# Altium PCB ES_PCB_6C_2L_2023.PcbDoc
Units mm, origin at the board's own origin, x right, y up, seen from the top; angles counter-clockwise.
Board outline 60 x 60 mm, 2 copper layers (Top Layer, Bottom Layer), stack 1.586 mm thick; 88 components, 85 nets, 290 pads, 95 vias.
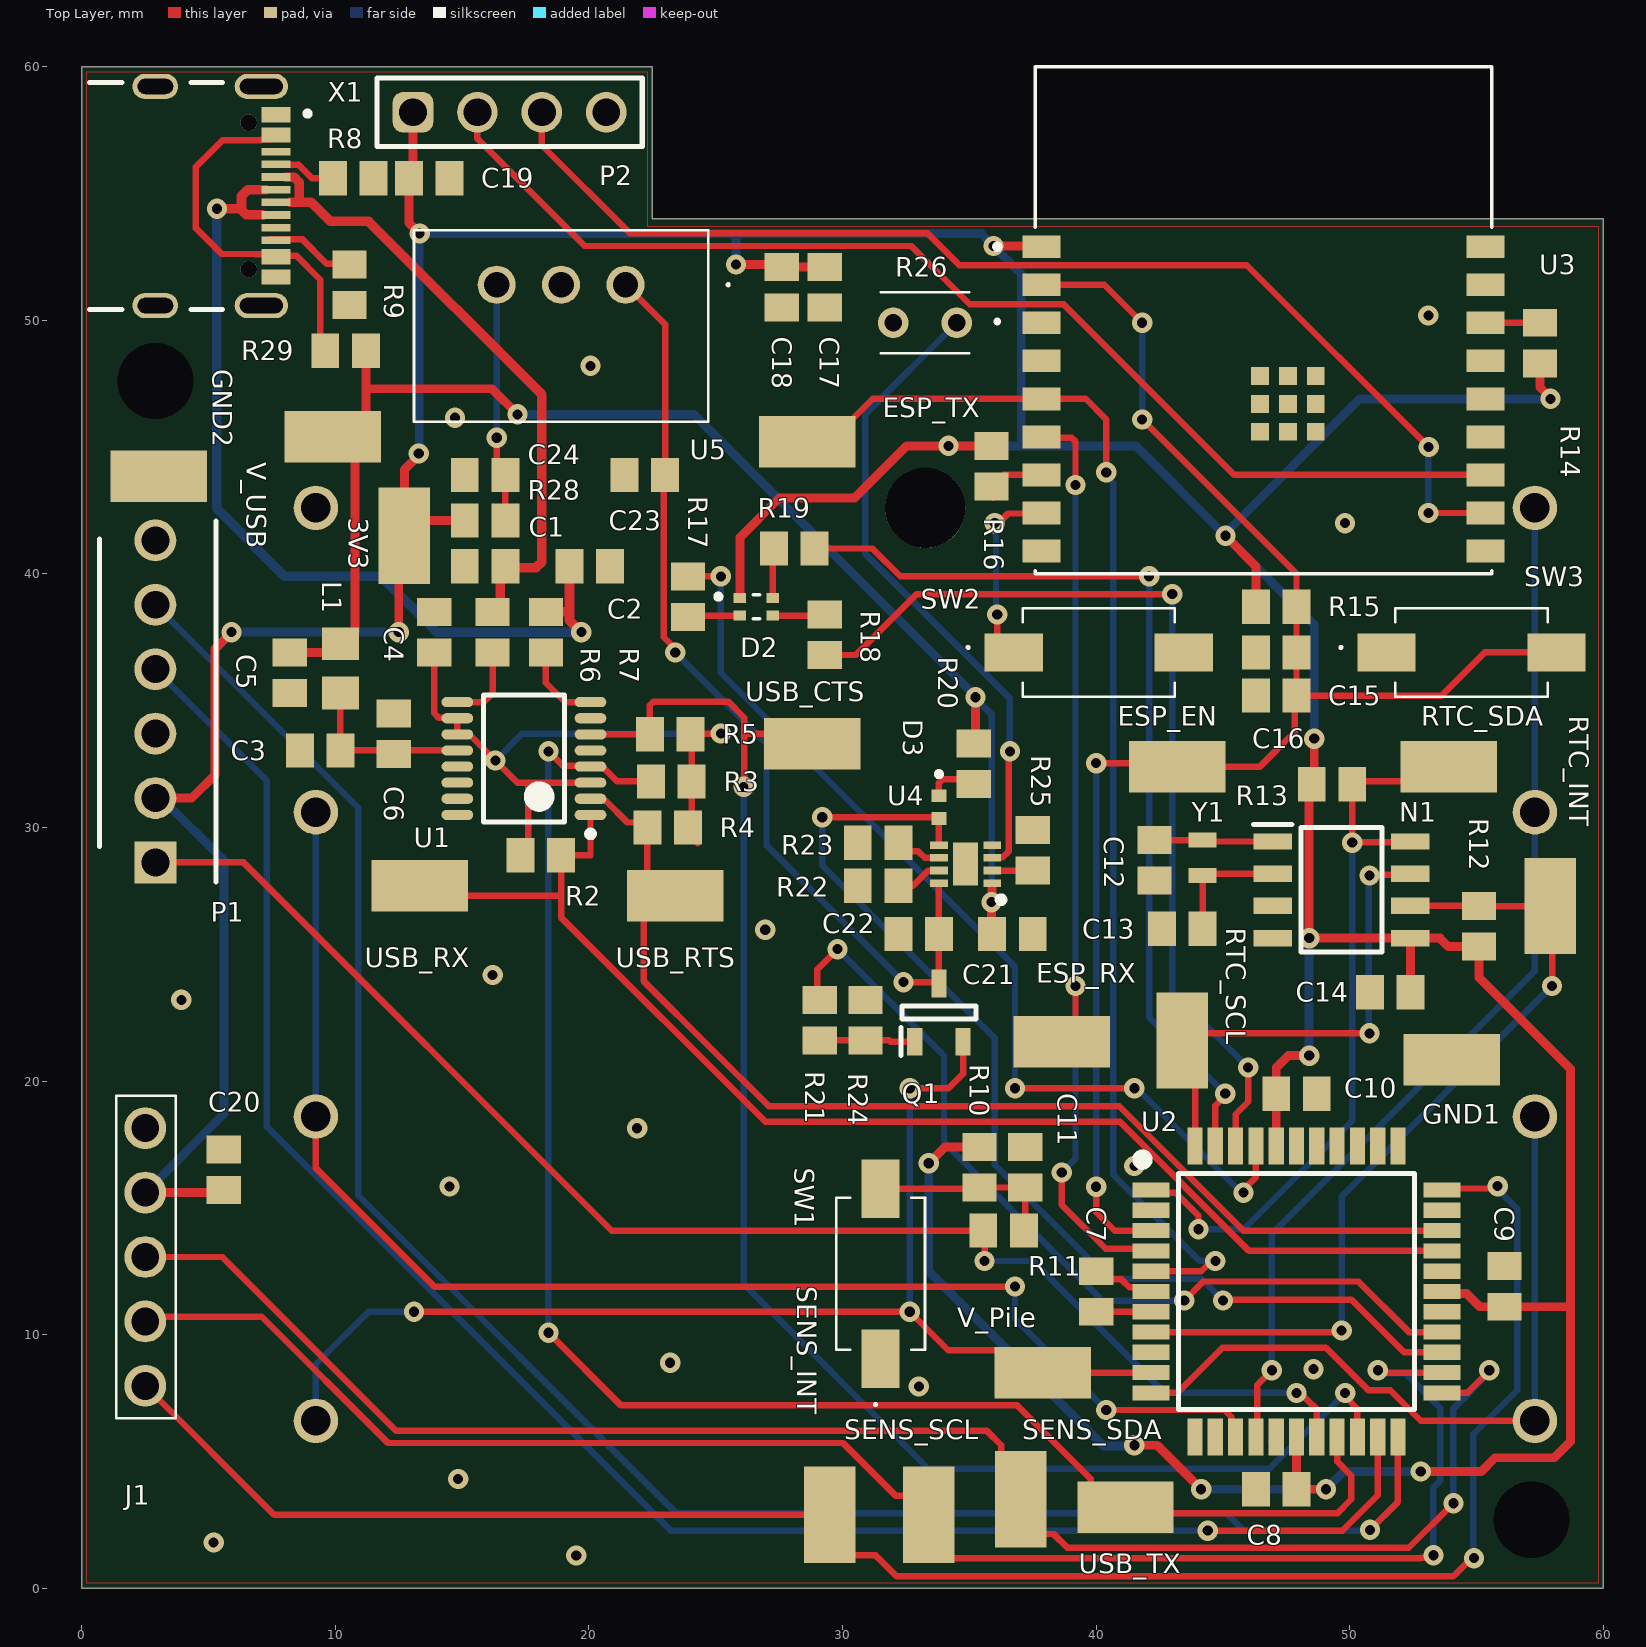
[diagram p0: Top Layer view]
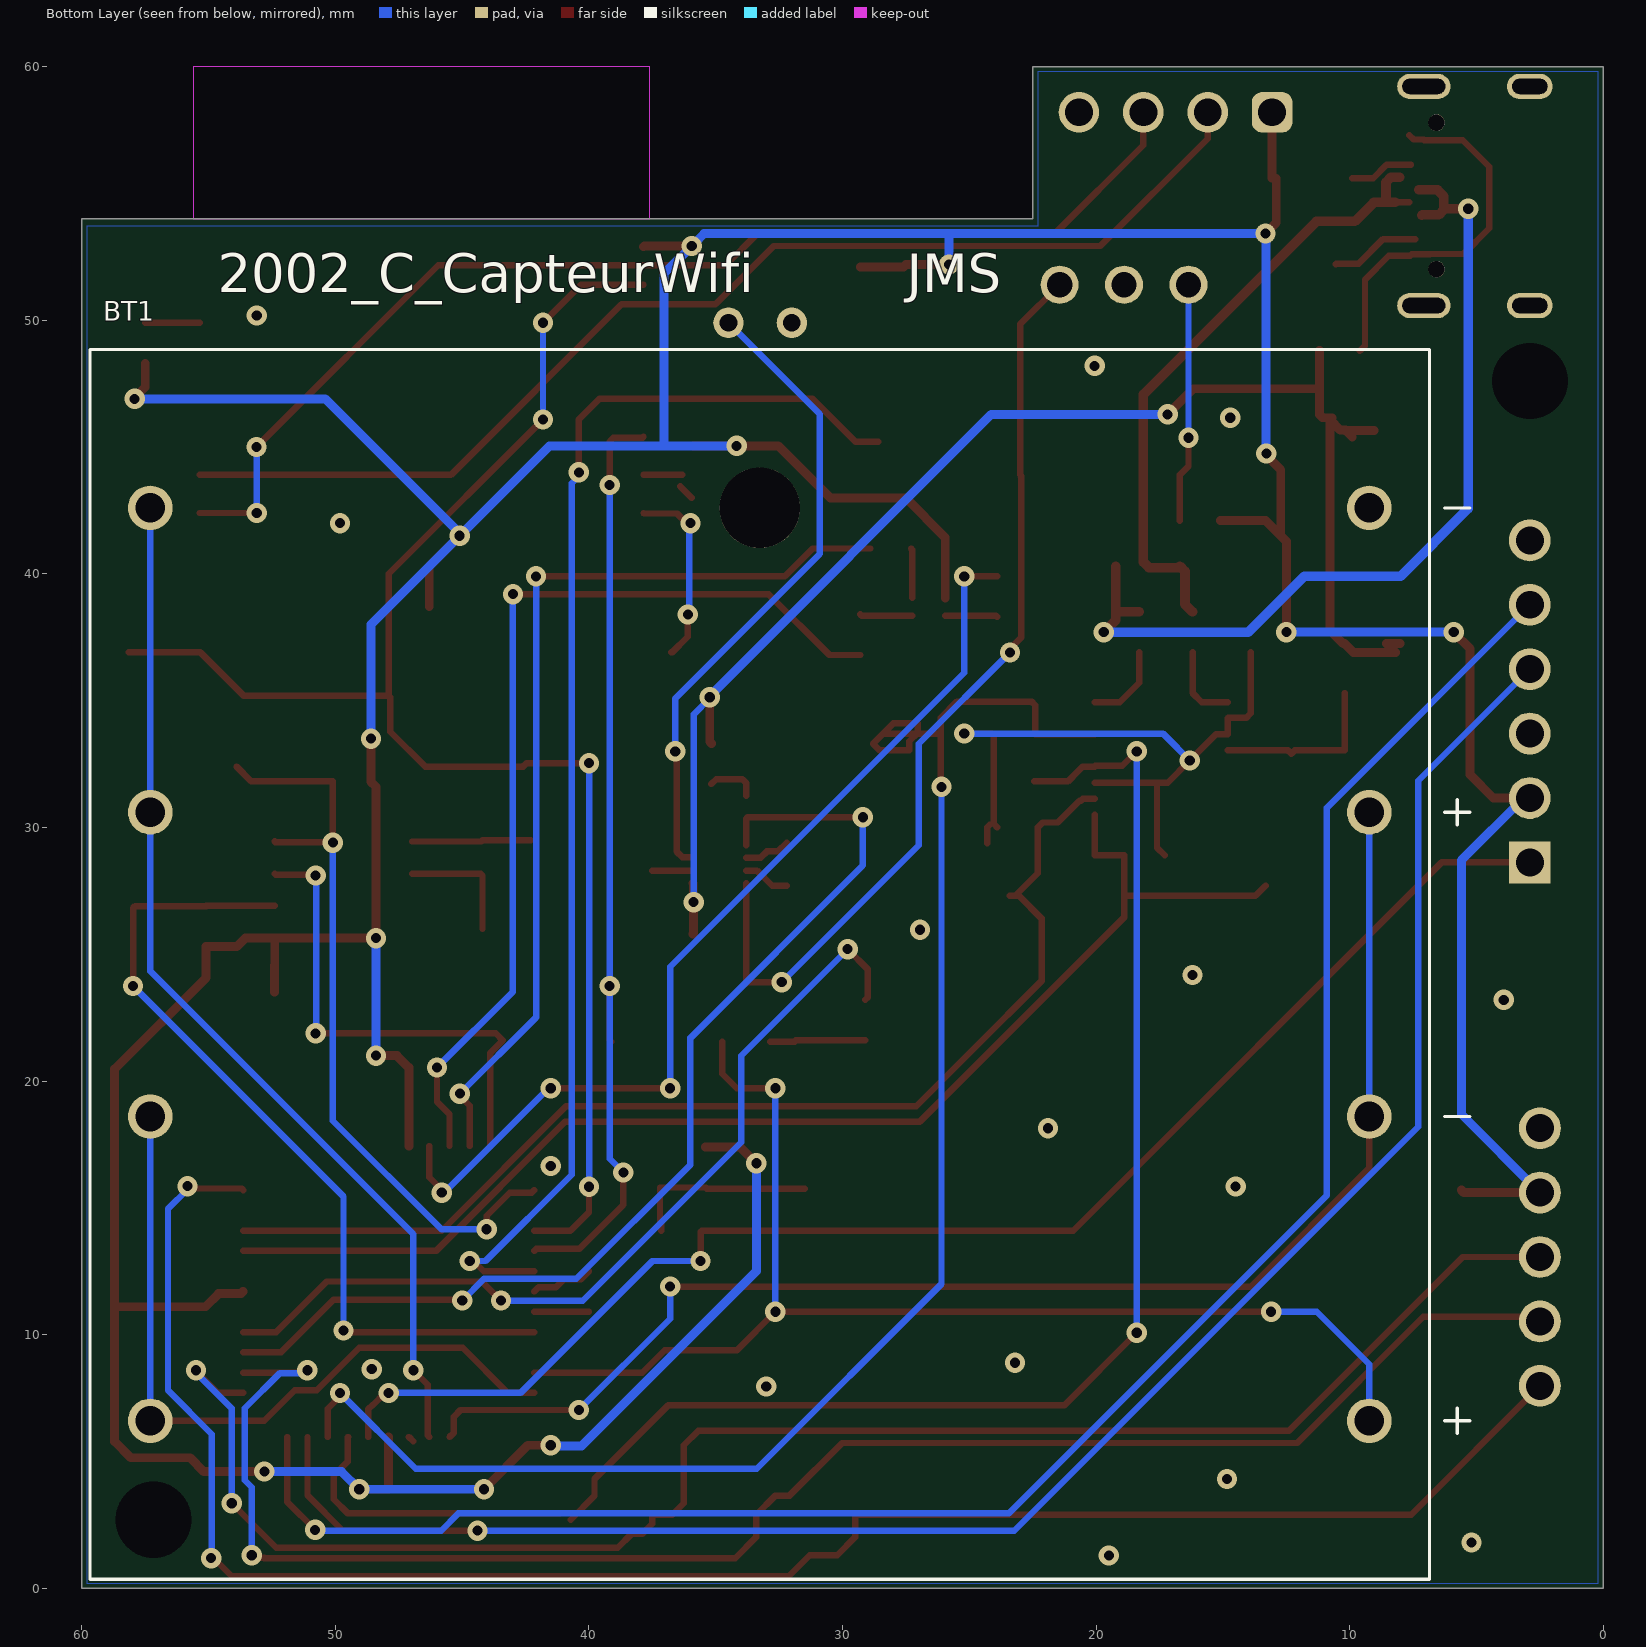
[diagram p1: Bottom Layer view, seen from below]

## Layer stack, top to bottom
Top Solder: solder mask 0.0102, Solder Resist, Dk 3.5
Top Layer: signal copper 0.018
Dielectric1: core 1.55, FR-4, Dk 4.8
Bottom Layer: signal copper 0.018
Bottom Solder: solder mask 0.0102, Solder Resist, Dk 3.5

## Board outline
0,60 22.5,60 22.5,54 60,54 60,0 0,0

## Design rules (kind name [scope] priority, off if disabled: settings)
BoardOutlineClearance [All] p1: gap=0.25 ignorepadtopadclearanceinfootprint=FALSE except(0: Arc-SplitContinuation Track-SplitContinuation SMDPad-SplitContinuation THPad-SplitContinuation Via-SplitContinuation Fill-SplitContinuation Poly-SplitContinuation Region-SplitContinuation Text-SplitContinuation)
Clearance Clearance-xPP-xTP-xTT [All] p1: gap=0.151 ignorepadtopadclearanceinfootprint=FALSE
ComponentClearance [All] p1: gap=0.25 collisioncheckmode=3 verticalgap=0.25 showdistances=FALSE
DiffPairsRouting [All] p1: maxlimit=0.25 minlimit=0.25 mostfreqgap=0.25 toplayer_minwidth=0.381 toplayer_maxwidth=0.381 toplayer_prefwidth=0.381 bottomlayer_minwidth=0.381 bottomlayer_maxwidth=0.381 bottomlayer_prefwidth=0.381 maxuncoupledlength=12.5
Height [All] p1: minheight=0 maxheight=25 prefheight=12.5
HoleSize HoleSize-PTH [All] p1: absolutevalues=TRUE maxlimit=10 minlimit=0.25 maxpercent=80.000 minpercent=20.000
HoleToHoleClearance [All] p1: gap=0.35 allowstackedmicrovias=TRUE
MinimumAnnularRing "Minimum IAR  >0.45mm" [((ObjectKind = 'Pad') OR (ObjectKind = 'Via')) And (Layer = 'MultiLayer') And (HoleDiameter > AsMM(0.45))] p1: minimumring=0.175 // minimum inner annular ring for pads > 0.45mm finished hole size
MinimumAnnularRing "Minimum IAR <=0.45mm" [((ObjectKind = 'Pad') OR (ObjectKind = 'Via')) And (Layer = 'MultiLayer') And (HoleDiameter <= AsMM(0.45))] p2: minimumring=0.175 // minimum inner annular ring for pads <= 0.45mm finished hole size
MinimumSolderMaskSliver [All] p1: minsoldermaskwidth=0.08
PasteMaskExpansion [All] p1: expansion=-0.025
PlaneClearance PlaneClearance-IPI [All] p1: clearance=0.25
PlaneConnect [All] p1: planeconnectstyle=Relief reliefexpansion=0.175 reliefentries=4 reliefconductorwidth=0.2 reliefairgap=0.2
PolygonConnect PolygonConnect-xTW [All] p1: connectstyle=Relief reliefconductorwidth=0.2 reliefentries=4 polygonreliefangle="90 Angle" airgapwidth=0.2
RoutingCorners [All] p1: cornerstyle=45-Degree minsetback=2.5 maxsetback=2.5
RoutingVias RoutingViasES [All] p1: holewidth=0.4 width=0.8 viastyle="Through Hole" minholewidth=0.25 minwidth=0.61 maxholewidth=0.5 maxwidth=1 // finishet hole size <= 0.45mm
SilkToSilkClearance [All] p1: silktosilkclearance=0.2
SilkToSolderMaskClearance SilkscreenOverComponentPads [IsPad] p1: minsilkscreentomaskgap=0.2 clearancetoexposedcopper=TRUE
SolderMaskExpansion [All] p1: expansion=0 istentingtop=FALSE
UnRoutedNet [All] p1: checkbadconnections=TRUE
Width Width-xTW [All] p1: maxlimit=1.5 minlimit=0.254 preferedwidth=0.254 minimp=50.000000 maximp=50.000000 favimp=50.000000
17 further rules are at their usual default settings.

## Classes and differential pairs
component class Puissance: C1 C2 C3 C4 C5 C6 L1 R2 R3 R4 R5 R6 R7 R8 R9 R29 U1 V_USB
component class Microcontrôleur: C7 C8 C9 C10 C11 P1 R10 R11 SW1 U2
component class Ethernet: C12 C13 C14 N1 R12 R13 Y1
component class ESP32: C15 C16 C17 C18 C19 P2 R14 R15 R16 SW2 SW3
component class Communication: C20 D2 J1 R17 R18 R19
component class 2002_SchemaBloc: ESP_EN ESP_RX ESP_TX RTC_INT RTC_SCL RTC_SDA SENS_INT SENS_SCL SENS_SDA USB_CTS USB_RTS USB_RX USB_TX V_Pile
differential pair DATA: +DATA_P -DATA_N

## Components (designator, comment, footprint, x,y, rotation, side; value= is the part's Value field where it differs from the comment)
3V3 "5019" TESTPOINT_SMD 12.72,41.5 r90 top
BT1 "BK-1264-PC8" BAT_BK-1264-PC8 33.265,24.6 r0 bottom
C1 "47pF" 0805 15.9,40.3 r180 top
C2 "47pF" 0805 20.032,40.3 r0 top
C3 "100nF" 0805 9.4,33.035 r180 top
C4 "100nF" 0805 13.9,37.7 r90 top
C5 "10nF" 0805 8.2,36.1 r270 top
C6 "4u7F" 0805 12.3,33.7 r90 top
C7 "10uF" 0805 40,11.7 r90 top
C8 "100nF" 0805 47.1,3.9 r0 top
C9 "100nF" 0805 56.1,11.9 r270 top
C10 "100nF" 0805 47.9,19.5 r180 top
C11 "100nF" 0805 37.2,16.6 r90 top
C12 "10pF" 0805 42.3,28.7 r90 top
C13 "10pF" 0805 43.4,26 r0 top
C14 "100nF" 0805 51.6,23.5 r180 top
C15 "1uF" 0805 47.1,36.9 r0 top
C16 "100nF" 0805 47.1,35.2 r180 top
C17 "10uF" 0805 29.3,51.3 r90 top
C18 "100nF16" 0805 27.6,51.3 r90 top
C19 "100nF" 0805 13.7,55.6 r180 top
C20 "100nF" 0805 5.6,16.5 r90 top
C21 "1uF" 0805 36.7,25.8 r0 top
C22 "1uF" 0805 33,25.8 r180 top
C23 "10uF" 0805 22.2,43.9 r180 top
C24 "22uF" 0805 15.9,43.9 r180 top
D2 "Red & Green & Blue,120°" LED_APHF1608LSEEQBDZGKC 26.6,38.7 r0 top
D3 "SML-P11VTT86R" LED_SML-P11VTT86R 33.8,30.8 r270 top
ESP_EN "5019" TESTPOINT_SMD 43.2,32.4 r180 top
ESP_RX "5019" TESTPOINT_SMD 38.646,21.55 r0 top
ESP_TX "5019" TESTPOINT_SMD 28.6,45.2 r180 top
GND1 "5019" TESTPOINT_SMD 54.028,20.842 r180 top
GND2 "5019" TESTPOINT_SMD 3.028,43.847 r180 top
J1 "SEN-22858" SEN-22858 2.5,18.14 r270 top
L1 "Inductance" FB_MI0805K601R-10 10.2,36.273 r270 top
N1 "MCP79411" MCP79411 49.678,27.54 r0 top
P1 "6 Pin header" "conecteur 1x6" 2.9,28.62 r90 top
P2 "4 pin header" 1x4 16.87,58.2 r0 top
Q1 "MOS_P" SI5618-TP 33.8,22.7 r90 top
R2 "10k" 0805 18.1,28.9 r180 top
R3 "10k" 0805 23.244,31.813 r0 top
R4 "10k" 0805 23.1,30 r0 top
R5 "10k" 0805 23.2,33.675 r0 top
R6 "27R" 0805 16.2,37.7 r270 top
R7 "27R" 0805 18.3,37.7 r270 top
R8 "5k1" 0805 10.7,55.6 r180 top
R9 "5k1" 0805 10.56,51.4 r90 top
R10 "10k" 0805 35.4,16.6 r270 top
R11 "1k" 0805 36.348,14.1 r180 top
R12 "10k" 0805 55.1,26.1 r90 top
R13 "10k" 0805 49.3,31.7 r0 top
R14 "10k" 0805 57.5,49.1 r90 top
R15 "10k" 0805 47.1,38.7 r0 top
R16 "10k" 0805 35.875,44.246 r90 top
R17 "560R" 0805 23.9,39.1 r270 top
R18 "100R" 0805 29.3,37.6 r90 top
R19 "100R" 0805 28.1,41 r180 top
R20 "3k2" 0805 35.174,32.513 r270 top value=3k
R21 "1k" 0805 29.1,22.4 r90 top
R22 "15k" 0805 31.4,27.7 r0 top
R23 "8k2" 0805 31.4,29.4 r0 top
R24 "10k" 0805 30.9,22.4 r270 top
R25 "4k3" 0805 37.5,29.1 r270 top
R26 "103AT-2" 103AT51PFT 34.5,49.9 r180 top
R28 "0R" 0805 15.9,42.1 r0 top
R29 "0R" 0805 10.4,48.8 r0 top
RTC_INT "5019" TESTPOINT_SMD 57.9,26.9 r90 top
RTC_SCL "5019" TESTPOINT_SMD 43.4,21.6 r90 top
RTC_SDA "5019" TESTPOINT_SMD 53.9,32.4 r180 top
SENS_INT "5019" TESTPOINT_SMD 29.5,2.9 r270 top
SENS_SCL "5019" TESTPOINT_SMD 33.4,2.9 r270 top
SENS_SDA "5019" TESTPOINT_SMD 37.02,3.502 r270 top
SW1 "Bouton" Switch 31.5,12.4 r90 top
SW2 "Bouton" Switch 40.1,36.9 r0 top
SW3 "Bouton" Switch 54.8,36.9 r0 top
U1 "FT230XS" FTDI-SSOP-16_L 17.435,32.717 r180 top
U2 "PIC32MX130F256D" PIC32MX130F256D-I/PT 47.9,11.7 r0 top
U3 "ESP32-C3-WROOM-02-N4" ESP32-C3-WROOM-02-H4 46.6,50 r0 top
U4 "BQ25172" BQ25172DSGR 34.85,28.55 r180 top
U5 "173950336" 173950336 21.44,51.4 r180 top
USB_CTS "5019" TESTPOINT_SMD 28.8,33.3 r180 top
USB_RTS "5019" TESTPOINT_SMD 23.4,27.3 r0 top
USB_RX "5019" TESTPOINT_SMD 13.32,27.7 r180 top
USB_TX "5019" TESTPOINT_SMD 41.158,3.2 r180 top
V_Pile "5019" TESTPOINT_SMD 37.9,8.5 r0 top (schematic designator V_Pile_Accu)
V_USB "5019" TESTPOINT_SMD 9.9,45.4 r0 top
X1 "USB-C" GCT_USB4105-GF-A 2.9,54.9 r270 top
Y1 "830062558" WE-XTAL_IQXC-25 44.2,28.8 r90 top

## Footprints (in the part's own frame and the unit in brackets; to place one, negate y for a bottom-side part, rotate by r counter-clockwise, add the part's x,y. Pads: shape width x height; smd on the part's side, far side on the other; paste and mask are expansions set on the pad)
1x4 [mm] "Pin Header, pitch 2.54 mm, THT, Vertical, single row, 4p"
  rrect50% 1.6x1.6 hole 1.1: 1(-3.81,0)
  round 1.6 hole 1.1: 2(-1.27,0) 3(1.27,0) 4(3.81,0)
  silkscreen extent -5.23,-1.34 5.23,1.35, body extent -5.08,-1.27 5.08,1.27, height 8.57
103AT51PFT [mm]
  round 1.2 hole 0.7: 1(0,0) 2(2.5,0)
  silkscreen extent -1.65,-1.2 3,1.2
0805 [mm] "Chip Capacitor, 2-Leads, Body 2.00x1.25mm, IPC High Density"
  rect 1.1x1.35 smd: 1(-0.8,0) 2(0.8,0)
  body extent -1.1,-0.72 1.1,0.72, height 1.4
173950336 [mm]
  round 1.5 hole 1: 1(0,0) 2(2.54,0) 3(5.08,0)
  silkscreen extent -4.1,-2.15 8.34,5.4
BAT_BK-1264-PC8 [mm]
  round 1.755 hole 1.17: 1+(-24.035,18) 1-(24.035,18) 2+(24.035,6) 2-(-24.035,6) 3+(-24.035,-6) 3-(24.035,-6) 4+(24.035,-18) 4-(-24.035,-18)
  round 3.17 hole 3.17 unplated: ""(0,-18)
  silkscreen extent -28,-24.25 26.41,24.25
BQ25172DSGR [mm]
  rect 0.7x0.3 smd: 1(-1.05,0.75) 2(-1.05,0.25) 3(-1.05,-0.25) 4(-1.05,-0.75) 5(1.05,-0.75) 6(1.05,-0.25) 7(1.05,0.25) 8(1.05,0.75)
  rect 1x1.7 smd: 9(0,0)
  silkscreen extent -1.53,1.28 -1.28,1.52
"conecteur 1x6" [mm]
  rect 1.65x1.65 hole 1.1: 1(0,0)
  round 1.65 hole 1.1: 2(2.54,0) 3(5.08,0) 4(7.62,0) 5(10.16,0) 6(12.7,0)
  silkscreen extent -0.77,-2.4 13.47,2.2, body extent -0.77,-2.3 13.47,2.3, height 9.34
ESP32-C3-WROOM-02-H4 [mm]
  rect 1.5x0.9 smd: 1(-8.75,2.9) 2(-8.75,1.4) 3(-8.75,-0.1) 4(-8.75,-1.6) 5(-8.75,-3.1) 6(-8.75,-4.6) 7(-8.75,-6.1) 8(-8.75,-7.6) 9(-8.75,-9.1) 10(8.75,-9.1) 11(8.75,-7.6) 12(8.75,-6.1) 13(8.75,-4.6) 14(8.75,-3.1) 15(8.75,-1.6) 16(8.75,-0.1) 17(8.75,1.4) 18(8.75,2.9)
  rect 0.7x0.7 smd: 19(-0.14,-2.2) 20(0.96,-2.2) 21(2.06,-2.2) 22(-0.14,-3.3) 23(0.96,-3.3) 24(2.06,-3.3) 25(-0.14,-4.4) 26(0.96,-4.4) 27(2.06,-4.4)
  Keep-Out Layer region: 9,4 -9,4 -9,10 9,10
  Keep-Out Layer region: 9,4 -9,4 -9,10 9,10
  silkscreen extent -10.6,-10 9,10, body extent -9,-10 9,10, height 3.35
FB_MI0805K601R-10 [mm]
  rect 1.285x1.47 smd: 1(-0.973,0) 2(0.973,0)
FTDI-SSOP-16_L [mm] "SOP, 16-Leads, Body 5x4mm, Pitch 0.635mm, IPC High Density"
  oval 1.25x0.4 smd: 1(-2.625,2.222) 2(-2.625,1.587) 3(-2.625,0.952) 4(-2.625,0.317) 5(-2.625,-0.318) 6(-2.625,-0.953) 7(-2.625,-1.588) 8(-2.625,-2.223) 9(2.625,-2.223) 10(2.625,-1.588) 11(2.625,-0.953) 12(2.625,-0.318) 13(2.625,0.317) 14(2.625,0.952) 15(2.625,1.587) 16(2.625,2.222)
  silkscreen extent -2.75,-2.5 1.6,3.1, body extent -2,-2.5 2,2.5, height 1.76
GCT_USB4105-GF-A [mm]
  rect 0.6x1.15 smd mask+0.05: A1_B12(-3.2,4.755) A4_B9(-2.4,4.755) B1_A12(3.2,4.755) B4_A9(2.4,4.755)
  rect 0.3x1.15 smd mask+0.05: A5(-1.25,4.755) A6(-0.25,4.755) A7(0.25,4.755) A8(1.25,4.755) B5(1.75,4.755) B6(0.75,4.755) B7(-0.75,4.755) B8(-1.75,4.755)
  oval 1x2.1 hole 0.6 slot 1.7 at 90 deg: SH1(-4.32,4.18) SH2(4.32,4.18)
  oval 1x1.8 hole 0.6 slot 1.4 at 90 deg: SH3(-4.32,0) SH4(4.32,0)
  round 0.65 hole 0.65 unplated: ""(-2.89,3.68) ""(2.89,3.68)
  silkscreen extent -4.47,-2.6 4.47,6.1
LED_APHF1608LSEEQBDZGKC [mm] "RGB"
  rect 0.5x0.4 smd: 1(-0.65,0.35) 2(-0.65,-0.35) 3(0.65,-0.35) 4(0.65,0.35)
  silkscreen extent -1.6,-0.48 0.14,0.5
LED_SML-P11VTT86R [mm]
  rect 0.5x0.6 smd: 1(0.45,0) 2(-0.45,0)
  silkscreen extent -1.4,-0.1 -1.2,0.1, body extent -0.5,-0.3 0.5,0.3, height 0.21
MCP79411 [mm]
  rect 1.525x0.65 smd: 1(-2.712,1.905) 2(-2.712,0.635) 3(-2.712,-0.635) 4(-2.712,-1.905) 5(2.712,-1.905) 6(2.712,-0.635) 7(2.712,0.635) 8(2.712,1.905)
  silkscreen extent -3.47,-2.45 1.6,2.58
PIC32MX130F256D-I/PT [mm]
  rect 1.475x0.6 smd: 1(-5.738,4) 2(-5.738,3.2) 3(-5.738,2.4) 4(-5.738,1.6) 5(-5.738,0.8) 6(-5.738,0) 7(-5.738,-0.8) 8(-5.738,-1.6) 9(-5.738,-2.4) 10(-5.738,-3.2) 11(-5.738,-4) 23(5.738,-4) 24(5.738,-3.2) 25(5.738,-2.4) 26(5.738,-1.6) 27(5.738,-0.8) 28(5.738,0) 29(5.738,0.8) 30(5.738,1.6) 31(5.738,2.4) 32(5.738,3.2) 33(5.738,4)
  rect 0.6x1.475 smd: 12(-4,-5.738) 13(-3.2,-5.738) 14(-2.4,-5.738) 15(-1.6,-5.738) 16(-0.8,-5.738) 17(0,-5.738) 18(0.8,-5.738) 19(1.6,-5.738) 20(2.4,-5.738) 21(3.2,-5.738) 22(4,-5.738) 34(4,5.738) 35(3.2,5.738) 36(2.4,5.738) 37(1.6,5.738) 38(0.8,5.738) 39(0,5.738) 40(-0.8,5.738) 41(-1.6,5.738) 42(-2.4,5.738) 43(-3.2,5.738) 44(-4,5.738)
  silkscreen extent -6.27,-4.65 4.65,5.4
SEN-22858 [mm]
  round 1.65 hole 1.1: 1(0,0) 2(2.54,0) 3(5.08,0) 4(7.62,0) 5(10.16,0)
  silkscreen extent -1.27,-1.15 11.43,1.2, body extent -7.61,-1.97 17.79,24.86, height 7.55
SI5618-TP [mm]
  rect 1.1x0.6 smd: 1(-1.15,0.95) 2(-1.15,-0.95) 3(1.15,0)
  silkscreen extent -1.7,-1.46 0.25,1.5
Switch [mm]
  rect 2.3x1.5 smd: 1(-3.35,0) 2(3.35,0)
  silkscreen extent -5.2,-1.75 3,1.75
TESTPOINT_SMD [mm]
  rect 3.8x2.03 smd: 1(0,0)
  body extent -1.91,-1.02 1.91,1.01, height 2.29
WE-XTAL_IQXC-25 [mm] "Quartz Crystal, size IQXC-25, body 2x1mm"
  rect 0.6x1.1 smd: 1(-0.7,0) 2(0.7,0)
  body extent -1,-0.6 1,0.6, height 0.55

## Part data
3V3 ESP_EN ESP_RX ESP_TX GND1 GND2 RTC_INT RTC_SCL RTC_SDA SENS_INT SENS_SCL SENS_SDA USB_CTS USB_RTS USB_RX USB_TX V_Pile V_USB: library part TESTPOINT, "Test point smd"
BT1: "Battery Holder (Open) AAA 4 Cell PC Pin", Package=None, Availability=Unavailable, MP=BK-1264-PC8, Price=None
C1 C2: library part Condensator, "Condensator"
C3 C4 C5 C6 C7 C12 C13 C14: library part Condensator, "0805 Condensator"
C8 C9 C10 C11 C16 C19: library part 885012207016, "Capacitor smd", Capacitance Tolerance=+/-10%, Case/Size Code=0805, Insulation Resistance=5GΩ, Manufacturer="Wurth Elektronik", Operating Temperature Max=125°C, Operating Temperature Min=-55°C, Rated Voltage (DC)=10V, Capacitance=100nF, Category="Multilayer Ceramic Chip Capacitors", Ceramic Type=X7R, ComponentLink1Description="Website Link", ComponentLink1URL=https://www.we-online.com/redexpert/article/885012207016?ad, ComponentLink2Description="Datasheet Link", ComponentLink2URL=https://www.we-online.com/redexpert/spec/885012207016?ad, Dissipation Factor=5%, Height=0.8mm, Length=2mm, Manufacturer Part Number=885012207016, Match Code=WCAP-CSGP, Mount="Surface Mount", Packaging="Tape and Reel", Technical Reference=X7R0805104K010DFCT10000, Width=1.25mm
C15: library part 885012207022, "Capacitor smd", Capacitance=1µF, Capacitance Tolerance=+/-10%, Case/Size Code=0805, Insulation Resistance=0.5GΩ, Manufacturer="Wurth Elektronik", Operating Temperature Max=125°C, Operating Temperature Min=-55°C, Rated Voltage (DC)=10V, Category="Multilayer Ceramic Chip Capacitors", Ceramic Type=X7R, ComponentLink1Description="Website Link", ComponentLink1URL=https://www.we-online.com/redexpert/article/885012207022?ad, ComponentLink2Description="Datasheet Link", ComponentLink2URL=https://www.we-online.com/redexpert/spec/885012207022?ad, Dissipation Factor=5%, Height=1.25mm, Length=2mm, Manufacturer Part Number=885012207022, Match Code=WCAP-CSGP, Mount="Surface Mount", Packaging="Tape and Reel", Technical Reference=X7R0805105K010DFCT10000, Width=1.25mm
C17: library part 885012107004, "Capacitor smd", Capacitance=10µF, Capacitance Tolerance=+/-20%, Case/Size Code=0805, Insulation Resistance=0.01GΩ, Manufacturer="Wurth Elektronik", Operating Temperature Max=85°C, Operating Temperature Min=-55°C, Rated Voltage (DC)=6.3V, Category="Multilayer Ceramic Chip Capacitors", Ceramic Type=X5R, ComponentLink1Description="Website Link", ComponentLink1URL=https://www.we-online.com/redexpert/article/885012107004?ad, ComponentLink2Description="Datasheet Link", ComponentLink2URL=https://www.we-online.com/redexpert/spec/885012107004?ad, Dissipation Factor=15%, Height=1.25mm, Length=2mm, Manufacturer Part Number=885012107004, Match Code=WCAP-CSGP, Mount="Surface Mount", Packaging="Tape and Reel", Technical Reference=X5R0805106M6R3DFCT10000, Width=1.25mm
C18: library part 885012207016, "Capacitor smd", Capacitance=100nF, Capacitance Tolerance=+/-10%, Case/Size Code=0805, Insulation Resistance=5GΩ, Manufacturer="Wurth Elektronik", Operating Temperature Max=125°C, Operating Temperature Min=-55°C, Rated Voltage (DC)=10V, Category="Multilayer Ceramic Chip Capacitors", Ceramic Type=X7R, ComponentLink1Description="Website Link", ComponentLink1URL=https://www.we-online.com/redexpert/article/885012207016?ad, ComponentLink2Description="Datasheet Link", ComponentLink2URL=https://www.we-online.com/redexpert/spec/885012207016?ad, Dissipation Factor=5%, Height=0.8mm, Length=2mm, Manufacturer Part Number=885012207016, Match Code=WCAP-CSGP, Mount="Surface Mount", Packaging="Tape and Reel", Technical Reference=X7R0805104K010DFCT10000, Width=1.25mm
C20 C21 C22 C23 C24: library part Condensator, "Capacitor smd"
D2: library part APHF1608LSEEQBDZGKC, "DEL standard - CMS RGB 0603 SMD", Emitting Color="Red & Green & Blue", Forward Voltage="3.3 V@Blue, 3.3 V@Green, 2 V@Red", Operating Temperature="-40 to 85 degC", Part Number=150066M153000, ComponentLink1Description=Manufacturer, ComponentLink1URL=http://www.we-online.de, ComponentLink2Description=Datasheet, ComponentLink2URL=http://katalog.we-online.de/led/datasheet/150066M153000.pdf, Dominant Wavelength="470 nm@Blue, 525 nm@Green, 624 nm@Red", Luminous Intensity="180 mcd@Blue, 900 mcd@Green, 285 mcd@Red", Mounting Technology=SMT, Peak Wavelength="468 nm@Blue, 520 nm@Green, 632 nm@Red", Published Date="May 2018", Publisher="Wurth Elektronik", Size=0606, Viewing Angle=120°
D3: library part 150080SS75000, "WL-SMCW Mono-color Chip LED Waterclear, size 0805, Super Red, 1.9V, 140°", Case/Size Code=0805, Emitting Color="Super Red", Forward Voltage=1.9V, Manufacturer="Wurth Elektronik", Operating Temperature Max=85°C, Operating Temperature Min=-40°C, Category="Signal LEDs", Chip Technology=AlInGaP, ComponentLink1Description="Website Link", ComponentLink1URL=https://www.we-online.com/redexpert/article/150080SS75000?ad, ComponentLink2Description="Datasheet Link", ComponentLink2URL=https://www.we-online.com/redexpert/spec/150080SS75000?ad, Dominant Wavelength=630nm, Height=0.7mm, Length=2mm, Luminous Intensity=60mcd, Manufacturer Part Number=150080SS75000, Match Code=WL-SMCW, Mount="Surface Mount", Packaging="Tape and Reel", Peak Wavelength=645nm, Viewing Angle=140°, Width=1.25mm
J1: library part BME280/ENS160, "BME280/ENS160", Manufacturer_Name=Amphenol, Manufacturer_Part_Number=68604-804HLF, Mouser2 Part Number=649-68604-804HLF, ComponentLink1Description=distributeur, ComponentLink1URL=https://www.digikey.ch/en/products/detail/sparkfun-electronics/SEN-22858/21679190?msockid=164a7d802847664138ed69fe294c67a6, ComponentLink2Description=Datasheet, ComponentLink2URL=https://docs.sparkfun.com/SparkFun_Environmental_Combo_Breakout_ENS160_BME280_QWIIC/assets/board_files/SparkFun_ENS160_BME280_Breakout_Schematic_V11.pdf, Datasheet Link=https://componentsearchengine.com/Datasheets/1/68604-804HLF.pdf, Height=12.39mm, Mouser2 Price/Stock=https://www.mouser.com/Search/Refine.aspx?Keyword=649-68604-804HLF
L1: library part CMP-2000-05196-1, "MI0805K601R-10", Current Rating (Max)=1.5A, DC Resistance (DCR) (Max)=100mOhm, Impedance @ Frequency=600Ohm@100MHz, Manufacturer=Laird, Operating Temperature=-40degC~125degC, Package / Case=0805(2012Metric), Package Description="2-Pin Surface Mount Device, Body 2 x 1.25 mm", Package Reference=MI0805K601R-10-2, Ratings=-, Standard Package=1, Catalog Drawings=(HI,HZ,LI,MI)0805Series_1.10mmMax.Height, Category=Filters, ComponentLink1Description=distributeur, ComponentLink1URL=https://eu.mouser.com/ProductDetail/Laird-Performance-Materials/MI0805K601R-10?qs=bbdZqDPQhEXXIHxc191aOg%3D%3D, ComponentLink2Description=Datasheet, ComponentLink2URL=https://eu.mouser.com/datasheet/2/987/mi0805k601r_10_datasheet-2947150.pdf, Datasheet URL=https://datasheet.ciiva.com/3082/mi0805k601r-10-a-vp-3082219.pdf, Datasheet Version="Rev. A, 01/2004", Family=FerriteBeadsandChips, Filter Type=PowerLine, Height (Max)="0.043\"(1.10mm)", Kits=240-2227-ND-KITEMIFERRITEBEADCHIPSMD, Manufacturer URL=https://www.lairdtech.com, Mounting Type=SurfaceMount, Number of Lines=1, Online Catalog=MISeries, Other Names=240-2390-1, Packaging=CutTape(CT), Series=MI, Size / Dimension="0.079\"Lx0.049\"W(2.00mmx1.25mm)", Supplier=Digikey, Supplier min. qty=1, Supplier Ref.=240-2390-1-ND, Supplier unit price=0.11
N1: "RTC", ComponentLink1Description=distributeur, ComponentLink1URL=https://eu.mouser.com/ProductDetail/Microchip-Technology/MCP79411-I-MS?qs=ggQiQSXuoRWmeAUZm6kXJQ%3D%3D, ComponentLink2Description=Datasheet, ComponentLink2URL=https://eu.mouser.com/datasheet/2/268/MCP79410_MCP79411_MCP79412_Battery_Backed_I2C_RTCC-3359732.pdf
P1: library part 61300611121, "WR-PHD Pin Header, THT, Vertical, pitch 2.54mm, 1 Row, 6P", Contact Resistance=20mΩ, Manufacturer="Wurth Elektronik", Operating Temperature Max=105°C, Operating Temperature Min=-40°C, Rated Current=3A, Withstanding Voltage=500V, Working Voltage=250V, Category="Board-to-Board Connectors", ComponentLink1Description="Website Link", ComponentLink1URL=https://www.we-online.com/redexpert/article/61300611121?ad, ComponentLink2Description="Datasheet Link", ComponentLink2URL=https://www.we-online.com/redexpert/spec/61300611121?ad, ComponentLink3Description=distributeur, ComponentLink3URL=https://eu.mouser.com/ProductDetail/Wurth-Elektronik/61300611121?qs=t4813l51qx%2FRpdf0Kp1HlQ%3D%3D, ComponentLink4Description=Datasheet, ComponentLink4URL=https://www.we-online.com/components/products/datasheet/61300611121.pdf, Gender="Pin Header", Manufacturer Part Number=61300611121, Match Code=WR-PHD, Mount="Through Hole", Number of Pins=6, Number of Rows=1, Orientation=Vertical, Packaging=Bag, Pitch=2.54mm
P2: library part 61300411121, "WR-PHD Pin Header, THT, Vertical, pitch 2.54mm, 1 Row, 4P", Contact Resistance=20mΩ, Manufacturer="Wurth Elektronik", Operating Temperature Max=105°C, Operating Temperature Min=-40°C, Rated Current=3A, Withstanding Voltage=500V, Working Voltage=250V, Category="Board-to-Board Connectors", ComponentLink1Description=distributeur, ComponentLink1URL=https://eu.mouser.com/ProductDetail/Wurth-Elektronik/61300411121?qs=PhR8RmCirEYQcLLqXD8rAA%3D%3D, ComponentLink2Description=Datasheet, ComponentLink2URL=https://www.we-online.com/components/products/datasheet/61300411121.pdf, Gender="Pin Header", Manufacturer Part Number=61300411121, Match Code=WR-PHD, Mount="Through Hole", Number of Pins=4, Number of Rows=1, Orientation=Vertical, Packaging=Bag, Pitch=2.54mm
R2 R3 R4 R5 R10 R11 R14 R15 R16 R17 R18 R19: library part RES-0805, "SMD Resistor"
  R2 R3 R4 R5 R10 R14 R15 R16: Resistance=10k
  R11: Resistance=1k
  R17: Resistance=560R
  R18 R19: Resistance=100R
R6 R7: library part RES-0805, "SMD Resistor 0805, 330Ω", Resistance=27R
R8 R9: library part CMP-2001-00528-1, Manufacturer=Panasonic, Part Number=ERJ6ENF2703V
R12 R13: library part CMP-2001-00528-1, "SMD Resistor", Manufacturer=Panasonic, Part Number=ERJ6ENF2703V
R20 R22 R23 R24 R25 R28: library part Res2_1, "Resistor smd", LatestRevisionDate=17-Jul-2002, LatestRevisionNote="Re-released for DXP Platform.", PackageDescription="Axial Device, Thru-Hole; 2 Leads; 0.4 in Pin Spacing", PackageReference=AXIAL-0.4, Published=8-Jun-2000, Publisher="Altium Limited"
R21: library part Res2, "Resistor smd", LatestRevisionDate=17-Jul-2002, LatestRevisionNote="Re-released for DXP Platform.", PackageDescription="Axial Device, Thru-Hole; 2 Leads; 0.4 in Pin Spacing", PackageReference=AXIAL-0.4, Published=8-Jun-2000, Publisher="Altium Limited"
R26: "thermistor", ComponentLink1Description=distributeur, ComponentLink1URL=https://www.mouser.ch/ProductDetail/Semitec/103AT-2?qs=wgO0AD0o1vvcDzsKguD%252Bew%3D%3D, ComponentLink2Description=Datasheet, ComponentLink2URL=https://www.mouser.ch/datasheet/2/362/semitec_atthermistor-1202913.pdf
R29: library part Res2_1, "Resistor", LatestRevisionDate=17-Jul-2002, LatestRevisionNote="Re-released for DXP Platform.", PackageDescription="Axial Device, Thru-Hole; 2 Leads; 0.4 in Pin Spacing", PackageReference=AXIAL-0.4, Published=8-Jun-2000, Publisher="Altium Limited"
SW1 SW2 SW3: library part 434121050836, "Tactile Switches WS-TASV Tact Switch", Manufacturer="Wurth Elektronik", Operating Temperature Max=85°C, Operating Temperature Min=-40°C, Rated Current=50mA, Rated Voltage (DC)=12V, Category="Tact Switches", Circuit=SPST-NO, ComponentLink1Description="Website Link", ComponentLink1URL=https://www.we-online.com/redexpert/article/434121050836?ad, ComponentLink2Description="Datasheet Link", ComponentLink2URL=https://www.we-online.com/redexpert/spec/434121050836?ad, ComponentLink3Description=distributeur, ComponentLink3URL=https://eu.mouser.com/ProductDetail/Wurth-Elektronik/434121050836?qs=wr8lucFkNMVxMSmJWja3%2Fg%3D%3D, ComponentLink4Description=Datasheet, ComponentLink4URL=https://www.we-online.com/components/products/datasheet/434121050836.pdf, Contact Material="Stainless Steel", Contact Plating=Silver, Height=5mm, Length=6mm, Manufacturer Part Number=434121050836, Match Code=WS-TASV, Mount="Surface Mount", Operation Force=360g, Packaging="Tape and Reel", Terminal Material="Copper Alloy", Terminal Plating=Silver, Washable=No, Width=3.5mm
U1: library part CMP-2000-06288-1, "USB to Basic UART IC, 2.97 to 5.5 V, -40 to 85 degC, 16-Pin SSOP, RoHS", Interface Case Style=SSOP, Manufacturer=FTDI, Operating Temperature Max=85°C, Operating Temperature Min=-40°C, Package Description="16-Pin Shrink Small Outline Package Integrated Circuit, Body 4.9 x 3.9 mm, Pitch 0.635 mm", Package Reference=SSOP-16, Supply Voltage Max=5.5V, Supply Voltage Min=2.97V, ComponentLink1Description=distributeur, ComponentLink1URL=https://www.mouser.ch/ProductDetail/FTDI/FT230XS-R?qs=Gp1Yz1mis3XyCLeYOseSng%3D%3D, ComponentLink2Description=Datasheet, ComponentLink2URL=https://www.mouser.ch/datasheet/2/163/DS_FT230X-5395.pdf, Data Rate=3Mbaud, Datasheet URL=http://www.ftdichip.com/Support/Documents/DataSheets/ICs/DS_FT230X.pdf, Datasheet Version="Rev. 1.4, 05/2016", Manufacturer URL=http://www.ftdichip.com/, Mounting Technology=SurfaceMount, MSL=MSL3-168hours, No. of Pins=16Pins, No. of Ports=-, Packaging=CutTape, Product Range=-, Supplier=Digikey, Supplier min. qty=1, Supplier Ref.=768-1135-1-ND, Supplier unit price=2.00, SVHC=NoSVHC(17-Dec-2015), USB Standard=USB2.0, USB Type=Transceiver
U2: library part PIC32MX130F256B-I_SS, "Integrated Circuit", Manufacturer_Name=Microchip, Manufacturer_Part_Number=PIC32MX130F256D-50I/PT, Mouser Part Number=579-MX130F256D50IPT, RS Part Number=8806720P, ComponentLink1Description=distributeur, ComponentLink1URL=https://eu.mouser.com/ProductDetail/Microchip-Technology/PIC32MX130F256D-50I-PT?qs=XR%2FfMt4sL%252BEAZuPDxF6NKQ%3D%3D, Datasheet=https://www.mouser.ch/datasheet/2/268/PIC32MX1XX2XX283644_PIN_Datasheet_DS60001168L-3443206.pdf, Height=2mm, Mouser Price/Stock=https://www.mouser.com/Search/Refine.aspx?Keyword=579-MX130F256BISS, RS Price/Stock=http://uk.rs-online.com/web/p/products/8806720P
U3: "WiFi Modules (802.11) (Engineering Samples) SMD module, ESP32-C3, 4MB SPI flash, PCB antenna, -40 C +85 C", Manufacturer_Name="Espressif Systems", Mouser Part Number=356-ESP32C3WROOM02N4, ComponentLink1Description=Datasheet, ComponentLink1URL=https://www.mouser.ch/datasheet/2/891/Espressif_Systems_04082021_ESP32_C3_WROOM_02-2295851.pdf, Datasheet Link=https://www.mouser.ch/datasheet/2/891/Espressif_ESP32_C3_WROOM_02-2006871.pdf, distributeur=https://www.mouser.co.uk/ProductDetail/Espressif-Systems/ESP32-C3-WROOM-02-N4?qs=stqOd1AaK7%2FqjTZKEOgfUg%3D%3D, Geometry.Height=3.35mm, Manufacturer_Part_Number=ESP32-C3-WROOM-02-N4
U4: "Linear Battery Charger for 1- to 6-Cell NiMH Batteries", ComponentLink1Description=Datasheet, ComponentLink1URL=https://www.ti.com/lit/ds/symlink/bq25172.pdf?ts=1723181325396&ref_url=https%253A%252F%252Fwww.ti.com%252Fproduct%252FBQ25172%253Fbm-verify%253DAAQAAAAJ_____wF_Ss5Mx06KPY5wuR_GF74KlZYjgF463_PIRlVM87DaDimX8hD-z5276A7B4TIBZX0NkuoKNaHBi_BIZQjDV1LkEa4XRsG8u1VR9BofVYTDsa9KgQteCP0sYfXOG9XXdaIOCU4KV78p5I1mhsmEOew16_50esNWIwSvDA3hHiIVf5i8-2P7KThDd6J7Jl4hgoO4l1TC-NrfqnpFAYdm-pJ9AU9Ln766c7PomkWTcyYO1H9qEKlA_yTBE6jjSW5w3O45YuJnRCFg0pGldNq3fYTHPtlSH1bEqJ5IycH_AYGXDBQnkfkbRS1wfv-ZE-mPqIHZclsKyH4WNfY1MM8vqArrSoJICNJdn9XZRI90A8FZbu-ed-N5SM80SaNCRuUgfrfBEdcsRTe5V1SxlZb-1CspPmd3, ComponentLink2Description=distributeur, ComponentLink2URL=https://www.mouser.ch/ProductDetail/Texas-Instruments/BQ25172DSGR?qs=tlsG%2FOw5FFgckLJXIVn4PA%3D%3D
U5: "DC DC CONVERTER 3.3V", ComponentLink1Description=distributeur, ComponentLink1URL=https://www.mouser.ch/ProductDetail/Wurth-Elektronik/173950336?qs=d0WKAl%252BL4KZw6hIvUkPbpg%3D%3D, ComponentLink2Description=Datasheet, ComponentLink2URL=https://www.we-online.com/components/products/datasheet/173950336.pdf, N° de fab.=173950336, N° Mouser=710-173950336
X1: library part "USB-C Type 2.0", "U262-161N-4BVC11", Supplier Part Number 1=C319148, ComponentLink1Description="LCSC  C319148", ComponentLink1URL=https://lcsc.com/product-detail/USB-Connectors_XKB-Connectivity-U262-161N-4BVC11_C319148.html, ComponentLink2Description=Datasheet, ComponentLink2URL=https://eu.mouser.com/datasheet/2/837/Global_Connector_Technology_usb4105-3106202.pdf, ComponentLink3Description=distributeur, ComponentLink3URL=https://eu.mouser.com/ProductDetail/GCT/USB4105-GF-A?qs=KUoIvG%2F9IlY%2FMLlBMpStpA%3D%3D, Supplier 1=LCSC
Y1: library part 830020423, "Crystals WE-XTAL 32.7680kHz 20ppm 2.0 x 1.2mm", Case/Size Code=HC49/4HSMX, Frequency=32kHz768, Frequency Stability=+/-50ppm, Frequency Tolerance=+/-30ppm, Load Capacitance=18pF, Manufacturer="Wurth Elektronik", Operating Temperature Max=70°C, Operating Temperature Min=-20°C, Category=Crystals, ComponentLink1Description=distributeur, ComponentLink1URL=https://eu.mouser.com/ProductDetail/Wurth-Elektronik/830062558?qs=2WXlatMagcGRj%2FV5lbTfrg%3D%3D, ComponentLink2Description=Datasheet, ComponentLink2URL=https://www.we-online.com/components/products/datasheet/830062558.pdf, Height=4.3mm, Length=11.4mm, Manufacturer Part Number=830020423, Match Code=WE-XTAL, Mount="Surface Mount", Packaging="Tape and Reel", Width=4.9mm
Q1: ComponentLink1Description="New link", ComponentLink1URL=https://www.mouser.ch/ProductDetail/Micro-Commercial-Components-MCC/SI5618-TP?qs=GedFDFLaBXHJp%2FsrOFCJpg%3D%3D

## Free pads (board coordinates)
  round 0 hole 3: 8(2.9,47.607) 8(57.165,2.7)

## Via types
v1: diameter 0.8, hole 0.4, Top Layer to Bottom Layer, 95 vias

## Nets (pads, with @x,y where several pads share a name; then routed paths per layer and width w, separated by ;. In a path a pad name is that pad's centre, name@x,y a point inside that pad or via, vN(x,y) a via of type N, cw(c..) or ccw(c..) an arc to the next point about the centre after c; other vN are vias at no path point)
+3V3: 3V3.1 C8.2 C9.2 C10.2 C14.1 C17.2 C18.2 C19.2 C20.1 D2.1 J1.2 N1.5 P1.2 P2.1 R10.1 R12.1 R13.1 R14.1 R15.1 R16.2 R28.1 U2.17 U2.28 U2.40 U3.1 | length 245.4
  Top Layer w0.35: J1.2 5.5,15.6 C20.1 ; P1.2 4.337,31.16 5.254,32.077 5.254,37.038 5.9,37.684 v1(5.9,37.7) ; v1(12.5,37.7) 12.5,41.28 3V3.1 ; C19.2 12.9,53.853 13.323,53.43 v1(13.323,53.423) ; C19.2@13.06,55.6 P2.1 ; v1@13.32,44.7 12.72,44.1 3V3.1 ; R28.1 13.32,42.1 3V3.1 ; v1(25.8,52.2) 27.5,52.2 C18.2 C17.2 ; D2.1 25.95,41.429 27.513,42.992 30.481,42.992 32.535,45.046 v1(34.178,45.046) R16.2 ; v1@33.4,16.752 34.048,17.4 R10.1 ; v1(35.95,52.928) 37.822,52.928 U3.1 ; v1(41.507,5.634) 42.409,5.634 v1(44.141,3.903) ; v1(45.1,41.5) 46.3,40.3 R15.1 ; U2.40 C10.2 47.1,20.528 47.572,21 v1(48.4,21) ; U2.17 C8.2 v1@49.061,3.9 ; v1(48.6,33.5) 48.6,31.8 48.4,31.6 v1(48.4,25.635) N1.5 ; C14.1 52.4,24.549 52.39,24.559 N1.5 ; v1(52.8,4.6) 55.185,4.6 55.727,5.142 58.065,5.142 58.712,5.789 58.712,11.1 ; U2.28 53.722,11.616 54.608,11.616 55.124,11.1 C9.2 58.712,11.1 ; R14.1 57.5,47.369 57.916,46.953 v1(57.916,46.9) ; N1.5 53.555,25.635 53.89,25.3 R12.1 55.1,24.078 58.712,20.466 58.712,11.1
  Bottom Layer w0.35: J1.2 5.6,18.7 5.6,28.7 3.14,31.16 P1.2 ; v1(5.9,37.7) v1(12.5,37.7) ; v1(13.289,44.744) 13.306,44.761 13.306,53.405 v1(13.323,53.423) 25.552,53.423 ; 25.582,53.423 25.8,53.423 ; v1(25.8,52.2) 25.8,53.423 ; v1(33.4,16.755) 33.4,12.5 40.3,5.6 41.473,5.6 v1(41.507,5.634) ; v1(34.178,45.046) 37.045,45.046 ; v1(44.141,3.903) v1(49.061,3.903) 49.761,4.603 52.797,4.603 v1(52.8,4.6) ; v1(48.4,21) v1(48.4,25.635) ; v1(48.6,33.5) 48.6,38 v1(45.1,41.5) ; v1(57.916,46.9) 50.4,46.9 45.1,41.6 v1(45.1,41.5) ; 25.8,53.423 33.277,53.423 33.28,53.42 35.458,53.42 35.854,53.024 37.045,51.833 37.045,45.046 ; 37.045,45.046 41.554,45.046 v1(45.1,41.5)
+5V: C5.1 C21.1 L1.1 R20.1 R29.2 U4.1 V_USB.1 | length 58.9
  Top Layer w0.35: C5.1@8.016,37.246 8.546,37.246 C5.1 9.854,36.9 L1.1 10.257,37.246 10.773,37.762 10.773,46.073 10.367,45.667 10.167,45.667 V_USB.1 ; V_USB.1@9.05,45.65 V_USB.1@10.184,45.65 ; V_USB.1@10.69,46.156 11.068,46.156 11.2,46.288 11.2,47.35 ; R29.2 11.2,47.35 ; v1(17.181,46.288) 16.169,47.3 11.25,47.3 11.2,47.35 ; R20.1 35.238,33.377 v1(35.238,35.132) ; C21.1 35.874,25.826 v1(35.874,27.055) 35.887,27.067 35.887,27.787 U4.1
  Bottom Layer w0.254: v1(35.238,35.132) 35.238,35.092 35.874,34.456 v1(35.874,27.055)
  Bottom Layer w0.35: v1(17.181,46.288) 24.132,46.288 v1@35.263,35.157
Celule_1: BT1.1+ Q1.2 U2.10 V_Pile.1 | length 49.4
  Top Layer w0.254: v1@13.1,10.9 13.101,10.901 32.65,10.901 34.163,9.388 37.012,9.388 V_Pile.1 U2.10 ; v1(32.651,19.712) 34.175,19.712 34.75,20.287 Q1.2
  Bottom Layer w0.254: BT1.1+ 9.23,8.83 11.303,10.903 v1(13.1,10.903) ; v1(32.651,10.9) v1(32.651,19.712)
Celule_2: BT1.1- BT1.2+ U2.11 | length 29.1
  Top Layer w0.254: U2.11 43.2,7.7 44.978,9.478 49.061,9.478 50.739,7.8 51.6,7.8 52.8,6.6 BT1.1-
  Bottom Layer w0.254: BT1.1- BT1.2+
Celule_3: BT1.2- BT1.3+ U2.14 | length 55.8
  Top Layer w0.254: BT1.2- 9.23,16.57 13.909,11.891 36.791,11.891 v1(36.8,11.9) ; v1(40.4,7.026) 45.066,7.026 45.327,6.766 45.327,6.135 U2.14
  Bottom Layer w0.254: BT1.2- BT1.3+ ; v1(36.8,11.9) 36.8,10.627 v1(40.4,7.026)
Celule_4: BT1.3- BT1.4+ U2.15 | length 41.2
  Top Layer w0.254: U2.15 46.36,6.022 46.36,8.027 v1(46.927,8.593)
  Bottom Layer w0.254: v1(46.927,8.593) 46.927,13.963 57.3,24.336 BT1.3- BT1.4+
Charge_State: D3.1 U2.25 U4.5 | length 42.9
  Top Layer w0.254: v1(29.2,30.4) 33.75,30.4 D3.1 U4.5 ; v1(45,11.341) 45.04,11.381 50.061,11.381 52.142,9.3 U2.25
  Bottom Layer w0.254: v1(29.2,30.4) 29.2,28.5 36,21.7 36,16.7 40.5,12.2 44.141,12.2 v1(45,11.341)
Cmd_charge: R21.2 U2.26 | length 35.1
  Top Layer w0.254: R21.2 29,23.3 29,24.4 v1(29.8,25.2) ; v1(43.472,11.341) 44.226,12.095 50.339,12.095 52.334,10.1 U2.26
  Bottom Layer w0.254: v1(29.8,25.2) 34,21 34,17.586 40.246,11.341 v1(43.472,11.341)
DATA_N: C1.1 R6.1 X1.A7 X1.B7 | length 25.1
  Top Layer w0.254: X1.A7 7.663,54.658 X1.A7@8.203,54.658
  Top Layer w0.381: X1.B7@8.04,55.641 8.371,55.641 8.572,55.441 8.572,54.803 8.572,54.697 ; X1.A7@8.203,54.658 8.572,54.658 9.042,54.658 ; 9.068,54.632 9.8,53.9 11.311,53.9 18.14,47.071 18.14,40.466 17.917,40.242 16.758,40.242 C1.1 16.5,40.1 16.5,38.8 R6.1
DATA_P: C2.1 R7.1 X1.A6 X1.B6 | length 35.5
  Top Layer w0.381: v1(5.328,54.398) 6.294,54.398 ; X1.B6@7.155,54.142 7.138,54.159 6.49,54.159 6.294,54.354 6.294,54.894 6.542,55.142 X1.A6@7.271,55.142 ; R7.1 19.232,38.5 ; 19.232,38.168 19.232,38.5 ; C2.1 19.232,38.5 ; 19.236,38.164 v1(19.7,37.7)
  Bottom Layer w0.381: v1(5.328,54.398) 5.328,42.572 8,39.9 11.8,39.9 14,37.7 v1(19.7,37.7)
ESP-EN: C15.2 C16.1 ESP_EN.1 R15.2 SW3.2 U2.3 U3.2 | length 62.9
  Top Layer w0.254: U3.2 40.314,51.4 41.225,50.489 v1(41.814,49.9) ; v1(40,15.829) 40,14.831 40.731,14.1 U2.3 ; v1(40,32.535) 42.465,32.535 42.6,32.4 46.46,32.4 47.832,33.772 47.832,35.132 C16.1 ; v1@41.797,46.086 41.814,46.086 47.9,40 R15.2 C15.2 C16.1 ; SW3.2 55.323,36.9 53.623,35.2 C16.1
  Bottom Layer w0.254: v1(40,15.829) 39.995,15.834 39.995,32.53 v1(40,32.535) ; v1(41.814,46.089) v1(41.814,49.9)
ESP-RX: ESP_RX.1 U2.4 U3.6 | length 38.2
  Top Layer w0.254: U3.6 37.884,45.366 39.037,45.366 39.186,45.217 v1(39.186,43.5) ; v1(38.646,16.395) 38.646,15.113 40.374,13.384 42.078,13.384 U2.4 ; ESP_RX.1@39.124,21.55 39.186,21.612 v1(39.186,23.743)
  Bottom Layer w0.254: v1(38.646,16.395) 39.186,16.935 v1(39.186,43.5)
ESP-TX: ESP_TX.1 U2.5 U3.5 | length 50.9
  Top Layer w0.254: ESP_TX.1 29.485,45.2 31.185,46.9 U3.5 39.586,46.9 40.4,46.086 v1(40.4,44.003) ; U2.5 44.149,12.5 44.552,12.903 v1(44.7,12.903)
  Bottom Layer w0.254: v1(40.4,44.003) 40.4,43.855 40.678,43.577 40.678,16.306 44.081,12.903 v1(44.7,12.903)
GND: BT1.4- C1.2 C2.2 C3.2 C4.2 C5.2 C6.2 C7.2 C8.1 C9.1 C10.1 C11.2 C12.1 C13.1 C14.2 C15.1 C16.2 C17.1 C18.1 C19.1 C20.2 C21.2 C22.2 C23.2 C24.2 GND1.1 GND2.1 J1.1 N1.3 N1.4 P1.3 P2.4 pad.8 R8.1 R9.1 R22.1 R23.1 R24.1 R25.1 R26.2 SW1.1 SW2.2 SW3.1 U1.5 U1.13 U2.6 U2.16 U2.29 U2.39 U3.9 U4.4 U5.2 X1.A1_B12 X1.B1_A12 | length 2.7
  Top Layer w0.254: C7.2 40.326,12.174 40.999,12.174 41.3,11.873 41.989,11.873 U2.6 ; U2.16@46.927,5.789 U2.16
  other v1: 19.5,1.291 5.2,1.8 14.84,4.308 33.008,7.953 48.569,8.637 23.199,8.889 14.5,15.844 41.507,16.645 21.9,18.14 3.925,23.2 16.2,24.183 26.949,25.967 49.817,42 14.714,46.156 20.06,48.2 53.1,50.183
IO0: U3.18
IO1: U3.17
IO2: R14.2 U3.16 | length 2.2
  Top Layer w0.254: U3.16 R14.2
IO3: U3.15
IO4: U3.3
IO5: U3.4
IO8: R16.1 U3.7 | length 2.2
  Top Layer w0.254: R16.1@35.95,42.992 R16.1@36.404,43.446 ; R16.1@36.329,43.9 U3.7
IO9: SW2.1 U3.8 | length 7.4
  Top Layer w0.254: v1(36,42) 36.148,42 36.527,42.379 37.829,42.379 U3.8 ; v1(36.1,38.4) 36.1,37.523 36.723,36.9 SW2.1
  Bottom Layer w0.254: v1(36,42) 36.05,41.95 36.05,38.45 v1(36.1,38.4)
IO10: U3.10
IO18: U3.13
IO19: U3.14
LED_RGB_B: R19.1 U2.43 | length 37.4
  Top Layer w0.254: R19.1 31.173,41 32.273,39.9 v1(42.088,39.9) ; U2.43 44.7,19.027 v1@45.04,19.367
  Bottom Layer w0.254: v1(42.088,39.9) 42.088,22.508 v1(45.093,19.503)
LED_RGB_G: R18.1 U2.42 | length 37.9
  Top Layer w0.254: R18.1 30.518,36.8 32.918,39.2 v1(43,39.2) ; U2.42 45.5,18.693 45.993,19.185 v1@45.993,20.528
  Bottom Layer w0.254: v1(43,39.2) 43,23.523 v1(45.993,20.53)
LED_RGB_R: R17.1 U2.41 | length 39.1
  Top Layer w0.254: R17.1 v1(25.2,39.9) ; v1(36.8,19.712) 36.801,19.713 41.506,19.713 v1(41.507,19.715) ; v1(45.807,15.597) 45.807,15.716 46.3,16.209 U2.41
  Bottom Layer w0.254: v1(25.2,39.9) 25.2,36.1 36.8,24.5 v1(36.8,19.712) ; v1(41.507,19.715) 41.599,19.715 45.716,15.597 v1(45.807,15.597)
MCLR: P1.1 R11.2 U2.18 | length 57.2
  Top Layer w0.254: P1.1@3.598,28.432 P1.1 6.38,28.62 20.9,14.1 R11.2 35.6,14.048 v1(35.6,12.903) ; v1(47.9,7.7) 48.048,7.7 48.532,7.216 48.551,7.216 48.7,7.067 U2.18
  Bottom Layer w0.254: v1(35.6,12.903) 37.497,12.903 42.7,7.7 v1(47.9,7.7)
NetC3_1: C3.1 C6.1 L1.2 U1.12 | length 7
  Top Layer w0.254: L1.2 C3.1 12.165,33.035 C6.1 12.435,33.035 U1.12
NetC7_1: C7.1 U2.7 | length 2.2
  Top Layer w0.254: C7.1 U2.7
NetC11_1: C11.1 R10.2 R11.1 SW1.2 | length 7.5
  Top Layer w0.254: SW1.2 35.35,15.75 R10.2 C11.1 37.2,14.4 37.148,14.4 R11.1
NetC12_2: C12.2 N1.1 Y1.2 | length 4.7
  Top Layer w0.254: C12.2 Y1.2 44.255,29.445 N1.1
NetC13_2: C13.2 N1.2 Y1.1 | length 4.9
  Top Layer w0.254: C13.2 Y1.1 44.275,28.175 N1.2
NetC24_1: C24.1 R28.2 U5.3 | length 9.4
  Top Layer w0.254: v1(16.36,45.366) 16.36,44.24 C24.1 R28.2
  Bottom Layer w0.254: v1(16.36,45.366) U5.3
NetD1_1: 
NetD2_2: D2.2 R17.2 | length 2.1
  Top Layer w0.254: R17.2 23.95,38.35 D2.2
NetD2_3: D2.3 R18.2 | length 2.1
  Top Layer w0.254: D2.3 29.25,38.35 R18.2
NetD2_4: D2.4 R19.2 | length 2
  Top Layer w0.254: D2.4 27.25,40.95 R19.2
NetD3_2: D3.2 R20.2 | length 2
  Top Layer w0.254: D3.2 33.8,31.751 33.949,31.9 34.987,31.9 R20.2
NetD4_1: 
NetP1_6: P1.6
NetQ1_1: Q1.1 R21.1 R24.2 | length 3.8
  Top Layer w0.254: R21.1 R24.2 31.838,21.6 31.888,21.55 Q1.1
NetR6_2: R6.2 U1.9 | length 3.1
  Top Layer w0.254: U1.9 15.84,34.94 16.2,35.3 R6.2
NetR7_2: R7.2 U1.8 | length 3.3
  Top Layer w0.254: R7.2 18.3,35.707 19.067,34.94 U1.8
NetR8_2: R8.2 X1.A5 | length 2.5
  Top Layer w0.254: X1.A5@7.584,56.127 8.549,56.127 9.075,55.6 R8.2
NetR9_2: R9.2 X1.B5 | length 3.6
  Top Layer w0.254: X1.B5@7.415,53.2 8.686,53.2 9.653,52.234 10.526,52.234 R9.2
NetR22_2: R22.2 U4.7 | length 1.8
  Top Layer w0.254: R22.2 32.778,27.7 33.378,28.3 U4.7
NetR23_2: R23.2 U4.6 | length 1.8
  Top Layer w0.254: R23.2 32.547,29.053 32.982,29.053 33.235,28.8 U4.6
NetR25_2: R25.2 U4.2 | length 1.6
  Top Layer w0.254: U4.2 R25.2
NetR26_1: R26.1 U4.3 | length 25.5
  Top Layer w0.254: U4.3 35.923,28.823 36.316,28.823 36.547,29.054 36.547,32.947 v1(36.6,33)
  Bottom Layer w0.254: R26.1 30.9,46.3 30.9,40.784 36.6,35.084 v1@36.6,33.009
NetR29_1: R29.1 X1.A4_B9 X1.B4_A9 | length 14.7
  Top Layer w0.254: X1.A4_B9 7.482,57.127 7.085,57.127 7.058,57.1 5.55,57.1 4.5,56.05 4.5,53.628 5.515,52.613 6.83,52.613 6.848,52.595 7.56,52.595 7.617,52.538 8.462,52.538 9.4,51.6 9.4,49 R29.1
NetU1_7: U1.7
NetU1_14: U1.14
NetU1_15: U1.15
NetU1_16: U1.16
NetU2_2: U2.2
NetU2_9: U2.9
NetU2_12: U2.12
NetU2_13: U2.13
NetU2_27: U2.27
NetU2_32: U2.32
NetU2_34: U2.34
NetU2_35: U2.35
NetU2_36: U2.36
NetU2_37: U2.37
NetU2_38: U2.38
NetX1_A8: X1.A8
NetX1_B8: X1.B8
PGEC: P1.5 U2.22 | length 76.1
  Top Layer w0.254: v1(50.8,2.3) 51.9,3.4 U2.22
  Bottom Layer w0.254: P1.5 10.9,30.78 10.9,15.5 23.453,2.947 45.153,2.947 45.831,2.269 50.769,2.269 v1(50.8,2.3)
PGED: P1.4 U2.21 | length 73.1
  Top Layer w0.254: v1(44.4,2.269) 49.708,2.269 51.1,3.661 U2.21
  Bottom Layer w0.254: P1.4 7.3,31.84 7.3,18.2 23.231,2.269 v1(44.4,2.269)
RTC_INT: N1.6 R12.2 RTC_INT.1 U2.8 | length 33.2
  Top Layer w0.254: U2.8 42.177,10.085 49.6,10.085 v1@49.615,10.071 ; N1.6 55.095,26.905 R12.2 RTC_INT.1 57.978,26.822 v1(57.978,23.743)
  Bottom Layer w0.254: v1@49.681,10.137 49.681,15.446 v1(57.978,23.743)
  other v1: 49.681,10.164
RTC_SCL: N1.7 RTC_SCL.1 U2.44 | length 19.7
  Top Layer w0.254: U2.44 43.9,21.1 RTC_SCL.1 43.678,21.878 v1(50.778,21.878) ; v1(50.778,28.1) 50.815,28.138 52.352,28.138 N1.7
  Bottom Layer w0.254: v1(50.778,21.878) 50.754,21.902 50.754,28.076 v1(50.778,28.1)
RTC_SDA: N1.8 R13.2 RTC_SDA.1 U2.1 | length 30.4
  Top Layer w0.254: U2.1 42.265,15.597 43.127,15.597 44.036,14.688 v1(44.036,14.152) ; N1.8@52.394,29.449 N1.8 52.367,29.423 50.122,29.423 v1(50.1,29.4) 50.1,31.825 53.325,31.825 RTC_SDA.1
  Bottom Layer w0.254: v1(44.036,14.152) 45.817,14.152 50.1,18.435 v1(50.1,29.4)
RXD: P2.3 U3.11 | length 46.1
  Top Layer w0.254: P2.3 18.14,56.905 21.622,53.423 33.356,53.423 34.607,52.172 45.939,52.172 v1(53.111,45) ; v1@53.1,42.4 U3.11
  Bottom Layer w0.254: v1@53.1,42.4 53.1,44.989 v1(53.111,45)
  other v1: 53.1,42.403
"SENS INT": J1.5 SENS_INT.1 U2.33 | length 74.2
  Top Layer w0.254: J1.5 7.58,2.9 SENS_INT.1 29.5,2.015 30.215,1.3 31.3,1.3 32.127,0.473 54.09,0.473 54.803,1.186 v1(54.9,1.186) ; U2.33 53.7,15.762 55.764,15.762 v1@55.826,15.824
  Bottom Layer w0.254: v1(54.9,1.186) 54.872,1.214 54.872,6.072 56.6,7.8 56.6,14.958 55.826,15.732 v1@55.826,15.824
  other v1: 55.83,15.855
SENS_SCL: J1.4 SENS_SCL.1 U2.24 | length 67
  Top Layer w0.254: J1.4 2.68,10.7 7.1,10.7 12.074,5.726 30.015,5.726 32.089,3.652 32.648,3.652 SENS_SCL.1 33.4,2.015 34.229,1.186 52.8,1.186 52.81,1.196 53.196,1.196 v1(53.3,1.3) ; v1@51.041,8.5 U2.24
  Bottom Layer w0.254: v1@51.058,8.483 52.184,8.483 53.575,7.092 53.575,4.255 53.3,3.98 v1(53.3,1.3)
  other v1: 51.107,8.593
SENS_SDA: J1.3 SENS_SDA.1 U2.23 | length 66.5
  Top Layer w0.254: J1.3 5.54,13.06 12.4,6.2 35.693,6.2 36.259,5.634 36.259,3.35 36.709,2.9 37.5,2.9 37.5,2.545 37.908,2.137 38.32,2.137 38.866,1.591 52.331,1.591 v1(54.09,3.35) ; U2.23 54.634,7.7 55.434,8.5 v1@55.5,8.5
  Bottom Layer w0.254: v1(54.09,3.35) 54.09,7.09 v1@55.5,8.5
  other v1: 55.5,8.593
TXD: P2.2 U3.12 | length 46.3
  Top Layer w0.254: P2.2 15.6,57.162 19.834,52.928 32.714,52.928 35.014,50.628 38.715,50.628 45.443,43.9 U3.12
USB_CTS: R5.1 U1.6 U2.20 USB_CTS.1 | length 67.4
  Top Layer w0.254: U1.6 22.395,33.67 R5.1 ; R5.1@22.4,33.706 22.4,34.814 22.549,34.963 25.487,34.963 26.123,34.327 26.123,33.7 ; v1(26.1,31.6) 26.123,31.623 26.123,33.7 ; v1(49.817,7.7) 49.817,7.564 50.3,7.08 U2.20 ; 26.123,33.7 27.027,33.7 28.4,33.7 USB_CTS.1 ; USB_CTS.1 28.536,33.036 27.376,33.036 27.376,33.395 27.027,33.744 27.027,34.1 28,34.1 28.356,33.744 USB_CTS.1
  Bottom Layer w0.254: v1(26.1,31.6) 26.1,11.995 33.383,4.711 46.828,4.711 v1(49.817,7.7)
USB_RTS: R4.1 U1.2 U2.31 USB_RTS.1 | length 45.6
  Top Layer w0.254: U1.2 20.525,31.13 20.598,31.057 20.656,31.057 21.518,30.195 22.105,30.195 R4.1 22.3,28.188 23.188,27.3 USB_RTS.1 23.041,27.3 22.153,26.412 22.153,23.943 24.861,21.235 27.096,19 40.907,19 45.807,14.1 U2.31
USB_RX: R3.1 U1.4 U2.19 USB_TX.1 | length 65.1
  Top Layer w0.254: v1(18.4,10.071) 21.264,7.207 36.883,7.207 39.783,4.308 39.783,3.64 USB_TX.1@40.723,2.7 ; v1(18.4,33) 18.972,32.428 20.032,32.428 U1.4 20.525,32.4 20.682,32.243 20.683,32.243 21.113,31.813 R3.1 ; USB_TX.1@41.147,2.947 49.506,2.947 50.061,3.502 50.061,4.439 49.508,4.992 49.508,5.954 U2.19
  Bottom Layer w0.254: v1(18.4,10.071) v1(18.4,33)
USB_TX: R2.1 U1.1 U2.30 USB_RX.1 | length 51.1
  Top Layer w0.254: USB_RX.1 13.72,27.3 18.9,27.3 ; U1.1 20.06,28.9 R2.1 18.9,27.3 ; U2.30 46.03,13.3 40.93,18.4 26.949,18.4 18.9,26.449 18.9,27.3
V_out_Chargeur: C22.1 C23.1 Q1.3 U4.8 U5.1 | length 37.5
  Top Layer w0.254: U5.1 23,49.84 C23.1 22.947,43.847 22.947,37.501 23.4,37.048 v1(23.4,36.9) ; v1(32.4,23.9) 33.75,23.9 Q1.3 C22.1 U4.8
  Bottom Layer w0.254: v1(23.4,36.9) 27,33.3 27,29.3 v1(32.4,23.9)
VCCIO: C4.1 R2.2 R3.2 R4.2 R5.2 U1.3 U1.10 U1.11 | length 28.2
  Top Layer w0.254: C4.1 13.9,34.5 14.083,34.317 14.798,34.317 U1.10 U1.11 15.275,33.67 15.432,33.513 15.433,33.513 v1(16.307,32.642) 17.181,31.765 17.6,31.765 ; R2.2 17.6,29.2 17.6,31.765 ; U1.3 17.6,31.765 ; R4.2 24.044,30.144 R3.2 24.044,33.631 24.113,33.7 v1(25.2,33.7) ; R4.2@24.193,30.101 24.294,30 R4.2@24.294,29.369
  Bottom Layer w0.254: v1@16.2,32.535 17.365,33.7 v1(25.2,33.7)
pads on no net: BT1. U3.19 U3.20 U3.21 U3.22 U3.23 U3.24 U3.25 U3.26 U3.27 U4.9 X1. X1.SH1 X1.SH2 X1.SH3 X1.SH4

## Polygon pours and split planes (outlines as drawn)
GND on Bottom Layer "NONET_L02_P001" (solid, shelved, pour order 1): 0.2,59.8 22.3,59.8 22.3,53.7 59.8,53.7 59.8,0.2 0.2,0.2
GND on Top Layer "NONET_L01_P000" (solid, shelved, pour order 0): 0.2,59.8 22.3,59.8 22.3,53.7 59.8,53.7 59.8,0.2 0.2,0.2

## Silkscreen, mask and mechanical layers (free items; w line width, h text height)
Bottom Overlay:
  text "2002_C_CapteurWifi         JMS" at 54.646,51.106 h1.52
Outline:
  lines w0.254: 0,0 60,0 60,54 57.6,54 54.75,54 46.8,54 22.5,54 22.5,60 16.44,60 0,60 0,0

## Text inside footprints (layer, text, board x,y; h text height)
X1: Top 3D Body "PCB EDGE" at 0.4,49.5 h0.76 r270